# Altium PCB Teensywpinsfinal.PcbDoc
Units mil, origin at the board's own origin, x right, y up, seen from the top; angles counter-clockwise.
Board outline 6000 x 4000 mil, 2 copper layers (Top Layer, Bottom Layer), stack 12.8 mil thick; 56 components, 67 nets, 409 pads, 0 vias.
Unrouted connection lines stored in the file: 3.
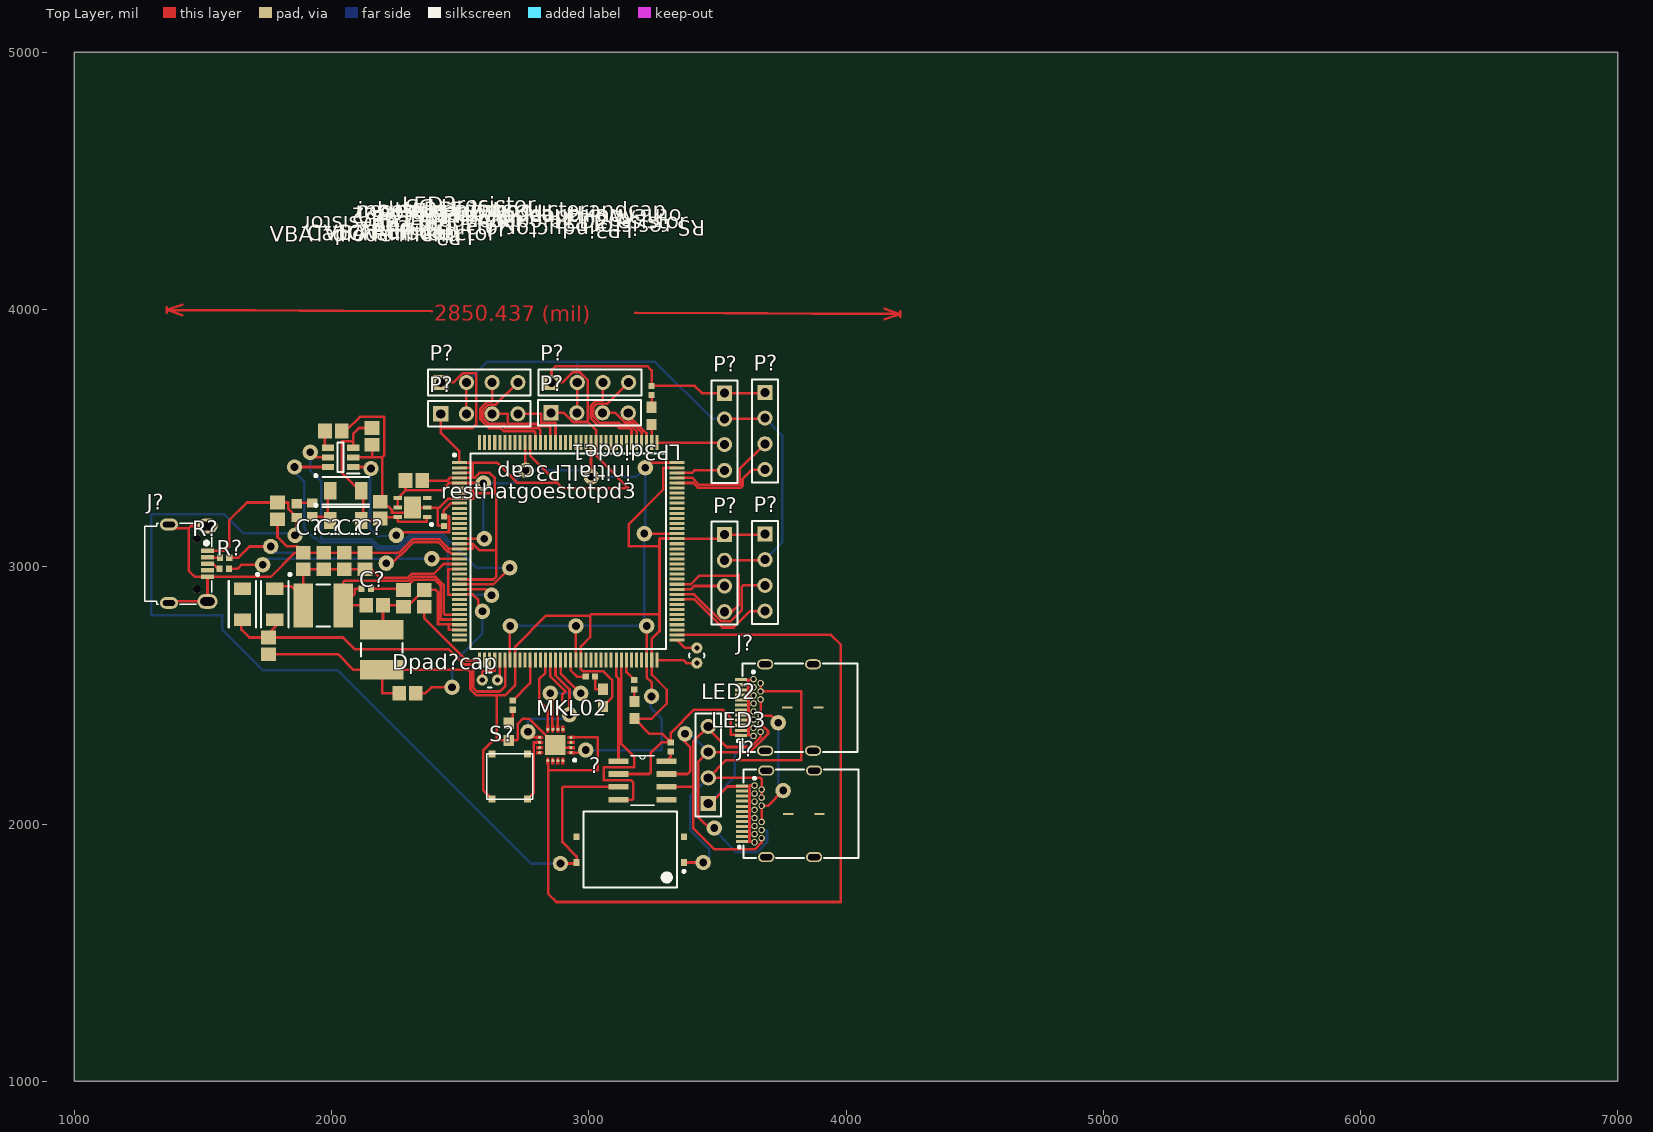
[diagram p0: Top Layer view]
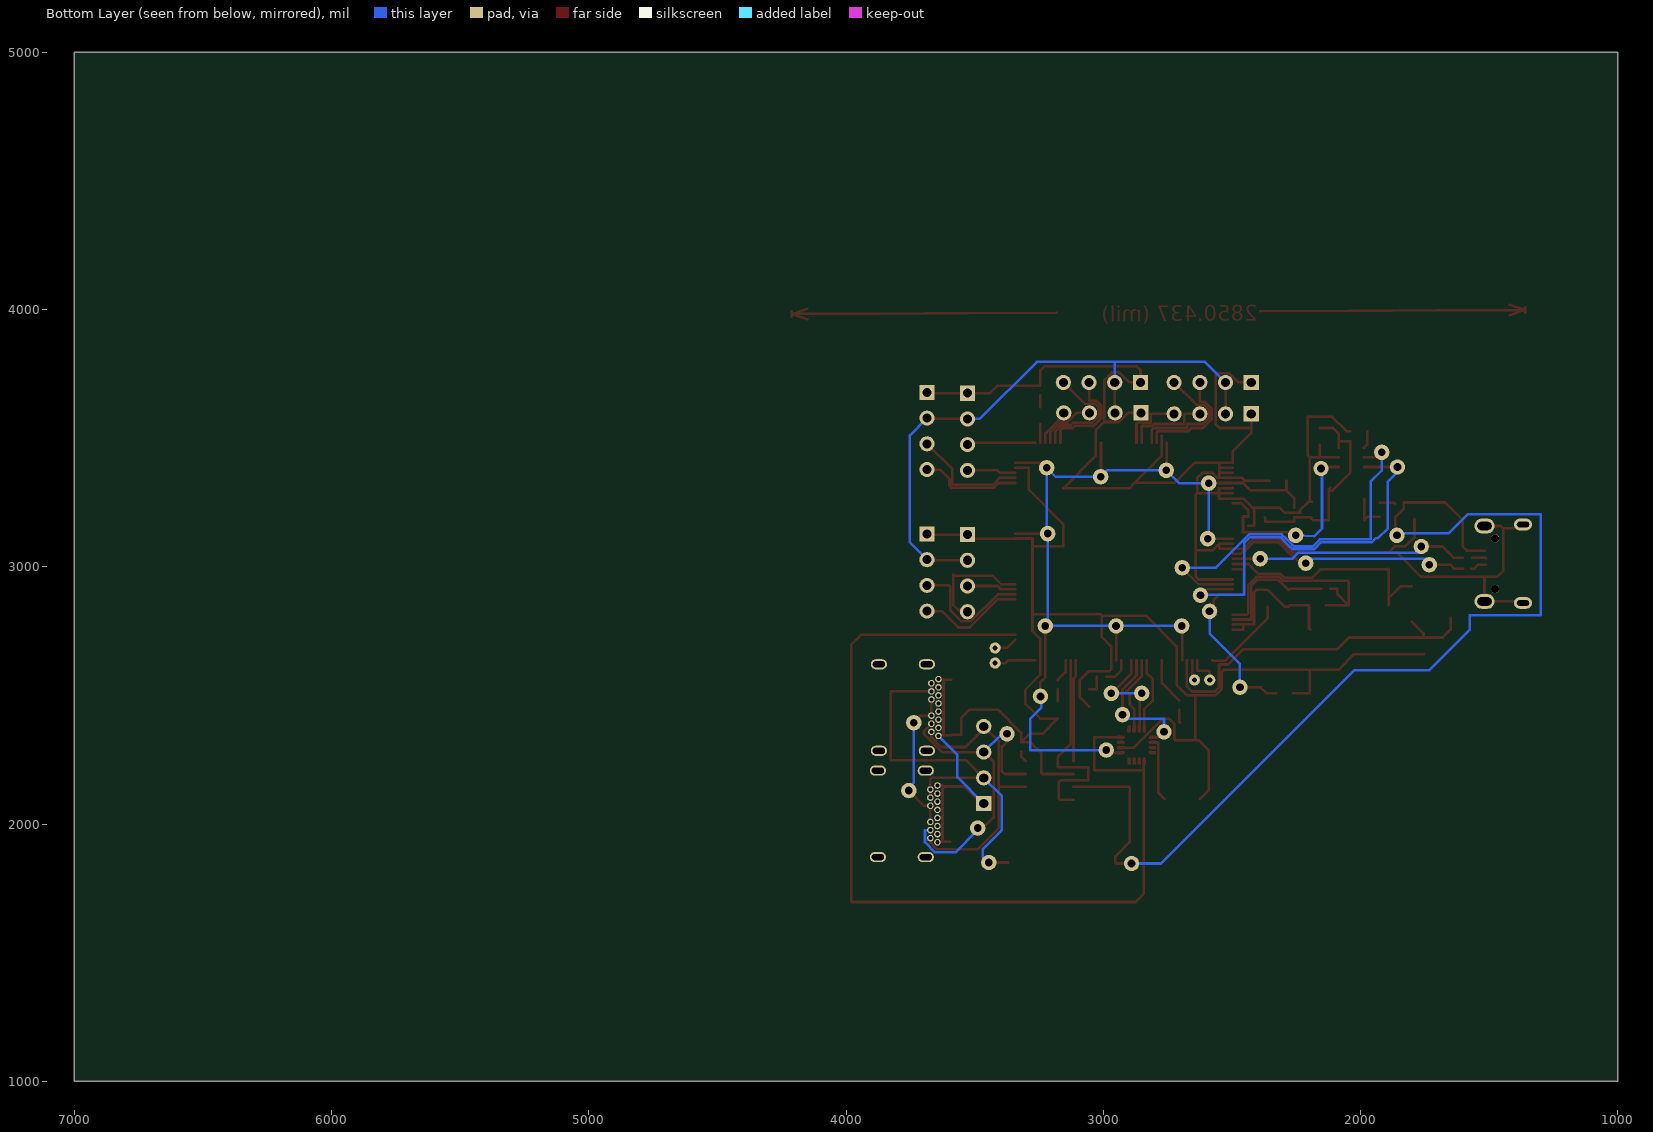
[diagram p1: Bottom Layer view, seen from below]

## Layer stack, top to bottom
Top Solder: solder mask 0.4, Solder Resist, Dk 3.5
Top Layer: signal copper 1.4
Dielectric 1: core 10, FR-4, Dk 4.2
Bottom Layer: signal copper 1.4
Bottom Solder: solder mask 0.4, Solder Resist, Dk 3.5

## Board outline
1000,1000 7000,1000 7000,5000 1000,5000

## Design rules (kind name [scope] priority, off if disabled: settings)
Clearance Clearance_1 [All] p1: gap=1 ignorepadtopadclearanceinfootprint=TRUE
Clearance [All] p2: gap=1 ignorepadtopadclearanceinfootprint=TRUE
ComponentClearance [All] p1: gap=1 collisioncheckmode=3 verticalgap=10 showdistances=FALSE
PolygonConnect [All] p1: connectstyle=Relief reliefconductorwidth=10 reliefentries=4 polygonreliefangle="90 Angle" airgapwidth=10
RoutingVias [All] p1: holewidth=28 width=50 viastyle="Through Hole" minholewidth=28 minwidth=50 maxholewidth=28 maxwidth=50
SolderMaskExpansion [All] p1: expansion=4
Width [All] p1: maxlimit=10 minlimit=10 preferedwidth=10
29 further rules are at their usual default settings.

## Classes and differential pairs
component class Teensywpinsfinal: "2nd inductor" ? "AREF cap" B? C? CapChainInductor D? dapthingy Dpad?cap F? inbetween1stinductorandcap initialLP3cap J? LED1 LED1resistor LED2 LED2resistor LED3 LED3resistor LP3 LP3diode1 LP3diode2 LP3diodecap LP3inductor MKL02 "next AREF cap" ondiode onlyTPD3cap otherweirdheader P? R? resthatgoestotpd3 "RS resistor" S? TPD3 TPD3capfromLP3 USBcap "VBAT diode" "VBAT diode cap" "VBAT diode friend" Y?

## Components (designator, comment, footprint, x,y, rotation, side; value= is the part's Value field where it differs from the comment)
"2nd inductor" "Inductor" INDC5041X06N 2195,2677.24 r90 top value=600
? "MCP2551-E/P" SOIC127P600X175-8N 3208.66,2169.29 r0 top
"AREF cap" "Cap" CAPC2012X06N 2280,2877.48 r270 top value=0.1uF
B? "MK66FX1M0VLQ18" QFP50P2200X2200X160-144N 2920,3060 r0 top
C? "Cap" CAPC2012X06N 2130,3022.52 r90 top value=0.1uF
C? "Cap" CAPC2012X06N 2050,3022.52 r90 top value=10nF
C? "Cap" CAPC2012X06N 1970,3022.52 r90 top value=10nF
C? "Cap" CAPC2012X06N 1890,3022.52 r90 top value=2.2uF
C? "Cap" CAPC2012X06N 2167.52,2850 r0 top value=2.2uF
CapChainInductor "Inductor" INDC5041X06N 1967.76,2850 r0 top value=600
dapthingy "Dip Switch" SOP254P1020X947-4N 2952.76,1950.39 r180 top
Dpad?cap "Cap" CAPC2012X06N 2295.28,2507.87 r180 top value=2.2uF
F? "500mA" CAPC1608X06N 1865,3218.43 r90 top
inbetween1stinductorandcap "Res1" CAPC1005X06N 2135,2915 r0 top value=470
initialLP3cap "Cap" CAPC2012X06N 2320,3335 r0 top value=2.2uF
J? "629105150521" 629105150521 1403.54,3011.81 r270 top
J? "632723100011" 632723100011 3813.19,2452.76 r90 top
J? "632723100011" 632723100011 3817.13,2039.37 r90 top
LED1 "LED0" 0603 2688.98,2358.27 r270 top
LED1resistor "Res1" CAPC1005X04N 2704.72,2462.2 r270 top value=1K
LED2 "LED0" 0603 3055.12,2490.16 r270 top
LED2resistor "Res1" CAPC1005X04N 3006.3,2573.23 r0 top value=1K
LED3 "LED0" 0603 3177.17,2442.91 r270 top
LED3resistor "Res1" CAPC1005X04N 3177.17,2541.73 r270 top value=1K
LP3 "LP38691SD-ADJ" SON95P300X300X80-7N 2315,3230 r180 top
LP3diode1 "Diode" SODFL370X105-2N 2055,3180 r0 top
LP3diode2 "Diode" SODFL370X105-2N 2055.12,3295.28 r0 top
LP3diodecap "Cap" CAPC2012X06N 2190,3220 r90 top value=0.1uF
LP3inductor "Inductor" CAPC1608X06N 1925,3221.57 r270 top value=120
MKL02 "MKL02Z32VFG4" QFN50P300X300X65-17N-D 2870.08,2307.09 r180 top
"next AREF cap" "Cap" CAPC2012X06N 2360,2877.52 r90 top value=0.1uF
ondiode "LED0" 0603 3244.09,3586.61 r90 top
onlyTPD3cap "Cap" CAPC2012X06N 2006.89,3527.56 r0 top value=100uF
otherweirdheader "Sensor8" HDR1X4 3464.57,2079.53 r90 top
P? "Sensor1" HDR1X4 2424.41,3594.49 r0 top
P? "Sensor3" HDR1X4 3685.04,3127.56 r270 top
P? "Sensor4" HDR1X4 2424.41,3716.54 r0 top
P? "Sensor6" HDR1X4 3685.04,3677.95 r270 top
P? "Sensor8" HDR1X4 2853.54,3598.43 r0 top
P? "Sensor7" HDR1X4 2855.12,3716.54 r0 top
P? "Sensor5" HDR1X4 3527.56,3125.2 r270 top
P? "Sensor2" HDR1X4 3527.56,3674.8 r270 top
R? "Res1" CAPC1005X06N 1582.68,2992.13 r0 top value=33
R? "Res1" CAPC1005X06N 1584.25,3035.43 r0 top value=33
R? "Res1" CAPC1005X06N 3244.09,3685.04 r90 top value=470
resthatgoestotpd3 "Res1" CAPC1005X06N 2437.01,3177.17 r90 top value=100K
"RS resistor" "Res1" CAPC1005X04N 3318.9,2299.21 r90 top value=10K
S? "TL3315NF100Q" TL3315NF100Q 2692.91,2185.04 r90 top
TPD3 "TPD3S014DBVR" SOT95P280X145-6N 2035.43,3425.2 r180 top
TPD3capfromLP3 "Cap" CAPC2012X06N 2157.48,3506.89 r270 top value=2.2uF
USBcap "Cap" CAPC2012X06N 1790,3217.48 r270 top value=2.2uF
"VBAT diode" "Diode" SODFL370X105-2N 1653.54,2854.33 r270 top
"VBAT diode cap" "Cap" CAPC2012X06N 1755,2692.48 r270 top value=0.1uF
"VBAT diode friend" "Diode" SODFL370X105-2N 1779.53,2854.33 r270 top
Y? "R145-32.768" R145 3420,2655 r180 top
Y? "R145-32.768" R145 2615.47,2560 r90 top

## Footprints (in the part's own frame and the unit in brackets; to place one, negate y for a bottom-side part, rotate by r counter-clockwise, add the part's x,y. Pads: shape width x height; smd on the part's side, far side on the other; paste and mask are expansions set on the pad)
0603 [mm]
  rect 1.1x1 smd: 1(-0.85,0) 2(0.85,0)
629105150521 [mm] "Micro USB 2.0 SMT Type B Horizontal 5 Contacts High Current"
  rect 0.45x1.3 smd: 1(-1.3,2.9) 2(-0.65,2.9) 3(0,2.9) 4(0.65,2.9) 5(1.3,2.9)
  oval 1.15x1.8 hole 0.55 slot 1.2 at 90 deg: Shell(-3.875,-0.9) Shell(3.875,-0.9)
  oval 1.45x2 hole 0.85 slot 1.4 at 90 deg: Shell(-3.725,2.9) Shell(3.725,2.9)
  round 0.8 hole 0.8 unplated: ""(-2.5,1.85) ""(2.5,1.85)
  silkscreen extent -4,-3.3 4,3.3, body extent -4,-3.3 4,3.3, height 2.71
632723100011 [mm] "USB 3.1 Type C Receptacle Horizontal THR"
  rect 0.3x1.2 smd: A1(-2.75,5.635) A2(-2.25,5.635) A3(-1.75,5.635) A4(-1.25,5.635) A5(-0.75,5.635) A6(-0.25,5.635) A7(0.25,5.635) A8(0.75,5.635) A9(1.25,5.635) A10(1.75,5.635) A11(2.25,5.635) A12(2.75,5.635)
  round 0.65 hole 0.4: B1(2.8,4.385) B2(2.4,3.685) B3(1.6,3.685) B4(1.2,4.385) B5(0.8,3.685) B6(0.4,4.385) B7(-0.4,4.385) B8(-0.8,3.685) B9(-1.2,4.385) B10(-1.6,3.685) B11(-2.4,3.685) B12(-2.8,4.385) Shell(-2,4.385) Shell(2,4.385)
  oval 1x1.6 hole 0.6 slot 1.2 at 90 deg: Shell(-4.27,-1.495) Shell(-4.27,3.235) Shell(4.27,-1.495) Shell(4.27,3.235)
  rect 0.2x1 smd: ""(0,1.055) ""(0,-2.045)
  silkscreen extent -4.37,-5.89 4.37,6.01, body extent -4.37,-5.89 4.37,5.9, height 3.05
CAPC1005X04N [mm] "Chip Capacitor, 2-Leads, Body 1.00x0.50mm, IPC Medium Density"
  rect 0.6x0.62 smd: 1(-0.46,0) 2(0.46,0)
  body extent -0.53,-0.28 0.53,0.27, height 0.37
CAPC1005X06N [mm] "Chip Capacitor, 2-Leads, Body 1.00x0.50mm, IPC Medium Density"
  rect 0.6x0.62 smd: 1(-0.46,0) 2(0.46,0)
  body extent -0.53,-0.28 0.53,0.27, height 0.6
CAPC1608X06N [mm] "Chip Capacitor, 2-Leads, Body 1.60x0.80mm, IPC Medium Density"
  rect 0.9x1 smd: 1(-0.675,0) 2(0.675,0)
  body extent -0.87,-0.48 0.87,0.47, height 0.6
CAPC2012X06N [mm] "Chip Capacitor, 2-Leads, Body 2.01x1.25mm, IPC Medium Density"
  rect 1.35x1.45 smd: 1(-0.825,0) 2(0.825,0)
  body extent -1.1,-0.72 1.11,0.72, height 0.6
HDR1X4 [mm] "Connector; Header; 4 Position"
  rect 1.5x1.5 hole 0.9: 1(0,0)
  round 1.5 hole 0.9: 2(2.54,0) 3(5.08,0) 4(7.62,0)
  silkscreen extent -1.27,-1.27 8.89,1.27
INDC5041X06N [mm] "Chip Inductor, 2-Leads, Body 5.00x4.06mm, IPC Medium Density"
  rect 1.91x4.33 smd: 1(-1.975,0) 2(1.975,0)
  silkscreen extent -0.65,-2.06 0.65,2.06, body extent -2.5,-2.15 2.5,2.15, height 0.6
QFN50P300X300X65-17N-D [mm]
  round 0.3 smd: 1(-1.55,0.75) 2(-1.55,0.25) 3(-1.55,-0.25) 4(-1.55,-0.75) 5(-0.75,-1.55) 6(-0.25,-1.55) 7(0.25,-1.55) 8(0.75,-1.55) 9(1.55,-0.75) 10(1.55,-0.25) 11(1.55,0.25) 12(1.55,0.75) 13(0.75,1.55) 14(0.25,1.55) 15(-0.25,1.55) 16(-0.75,1.55)
  rrect0% 2x2 smd: 17(0,0)
  Top Layer region: -1.9,0.9 -1.35,0.912 -1.235,0.865 -1.188,0.75 -1.235,0.635 -1.35,0.588 -1.35,0.6 -1.9,0.6 -1.9,0.9
  Top Layer region: -1.9,0.4 -1.35,0.412 -1.235,0.365 -1.188,0.25 -1.235,0.135 -1.35,0.088 -1.35,0.1 -1.9,0.1 -1.9,0.4
  Top Layer region: -1.9,-0.1 -1.35,-0.088 -1.235,-0.135 -1.188,-0.25 -1.235,-0.365 -1.35,-0.412 -1.35,-0.4 -1.9,-0.4 -1.9,-0.1
  Top Layer region: -1.9,-0.6 -1.35,-0.588 -1.235,-0.635 -1.188,-0.75 -1.235,-0.865 -1.35,-0.912 -1.35,-0.9 -1.9,-0.9 -1.9,-0.6
  Top Layer region: -0.9,-1.9 -0.912,-1.35 -0.865,-1.235 -0.75,-1.188 -0.635,-1.235 -0.588,-1.35 -0.6,-1.35 -0.6,-1.9 -0.9,-1.9
  Top Layer region: -0.4,-1.9 -0.412,-1.35 -0.365,-1.235 -0.25,-1.188 -0.135,-1.235 -0.088,-1.35 -0.1,-1.35 -0.1,-1.9 -0.4,-1.9
  Top Layer region: 0.1,-1.9 0.088,-1.35 0.135,-1.235 0.25,-1.188 0.365,-1.235 0.412,-1.35 0.4,-1.35 0.4,-1.9 0.1,-1.9
  Top Layer region: 0.6,-1.9 0.588,-1.35 0.635,-1.235 0.75,-1.188 0.865,-1.235 0.912,-1.35 0.9,-1.35 0.9,-1.9 0.6,-1.9
  Top Layer region: 1.9,-0.9 1.35,-0.912 1.235,-0.865 1.188,-0.75 1.235,-0.635 1.35,-0.588 1.35,-0.6 1.9,-0.6 1.9,-0.9
  Top Layer region: 1.9,-0.4 1.35,-0.412 1.235,-0.365 1.188,-0.25 1.235,-0.135 1.35,-0.088 1.35,-0.1 1.9,-0.1 1.9,-0.4
  Top Layer region: 1.9,0.1 1.35,0.088 1.235,0.135 1.188,0.25 1.235,0.365 1.35,0.412 1.35,0.4 1.9,0.4 1.9,0.1
  Top Layer region: 1.9,0.6 1.35,0.588 1.235,0.635 1.188,0.75 1.235,0.865 1.35,0.912 1.35,0.9 1.9,0.9 1.9,0.6
  Top Layer region: 0.9,1.9 0.912,1.35 0.865,1.235 0.75,1.188 0.635,1.235 0.588,1.35 0.6,1.35 0.6,1.9 0.9,1.9
  Top Layer region: 0.4,1.9 0.412,1.35 0.365,1.235 0.25,1.188 0.135,1.235 0.088,1.35 0.1,1.35 0.1,1.9 0.4,1.9
  Top Layer region: -0.1,1.9 -0.088,1.35 -0.135,1.235 -0.25,1.188 -0.365,1.235 -0.412,1.35 -0.4,1.35 -0.4,1.9 -0.1,1.9
  Top Layer region: -0.6,1.9 -0.588,1.35 -0.635,1.235 -0.75,1.188 -0.865,1.235 -0.912,1.35 -0.9,1.35 -0.9,1.9 -0.6,1.9
  silkscreen extent -2.02,1.38 -1.78,1.62
QFP50P2200X2200X160-144N [mm]
  rect 1.475x0.3 smd: 1(-10.738,8.75) 2(-10.738,8.25) 3(-10.738,7.75) 4(-10.738,7.25) 5(-10.738,6.75) 6(-10.738,6.25) 7(-10.738,5.75) 8(-10.738,5.25) 9(-10.738,4.75) 10(-10.738,4.25) 11(-10.738,3.75) 12(-10.738,3.25) 13(-10.738,2.75) 14(-10.738,2.25) 15(-10.738,1.75) 16(-10.738,1.25) 17(-10.738,0.75) 18(-10.738,0.25) 19(-10.738,-0.25) 20(-10.738,-0.75) 21(-10.738,-1.25) 22(-10.738,-1.75) 23(-10.738,-2.25) 24(-10.738,-2.75) 25(-10.738,-3.25) 26(-10.738,-3.75) 27(-10.738,-4.25) 28(-10.738,-4.75) 29(-10.738,-5.25) 30(-10.738,-5.75) 31(-10.738,-6.25) 32(-10.738,-6.75) 33(-10.738,-7.25) 34(-10.738,-7.75) 35(-10.738,-8.25) 36(-10.738,-8.75) 73(10.738,-8.75) 74(10.738,-8.25) 75(10.738,-7.75) 76(10.738,-7.25) 77(10.738,-6.75) 78(10.738,-6.25) 79(10.738,-5.75) 80(10.738,-5.25) 81(10.738,-4.75) 82(10.738,-4.25) 83(10.738,-3.75) 84(10.738,-3.25) 85(10.738,-2.75) 86(10.738,-2.25) 87(10.738,-1.75) 88(10.738,-1.25) 89(10.738,-0.75) 90(10.738,-0.25) 91(10.738,0.25) 92(10.738,0.75) 93(10.738,1.25) 94(10.738,1.75) 95(10.738,2.25) 96(10.738,2.75) 97(10.738,3.25) 98(10.738,3.75) 99(10.738,4.25) 100(10.738,4.75) 101(10.738,5.25) 102(10.738,5.75) 103(10.738,6.25) 104(10.738,6.75) 105(10.738,7.25) 106(10.738,7.75) 107(10.738,8.25) 108(10.738,8.75)
  rect 0.3x1.475 smd: 37(-8.75,-10.738) 38(-8.25,-10.738) 39(-7.75,-10.738) 40(-7.25,-10.738) 41(-6.75,-10.738) 42(-6.25,-10.738) 43(-5.75,-10.738) 44(-5.25,-10.738) 45(-4.75,-10.738) 46(-4.25,-10.738) 47(-3.75,-10.738) 48(-3.25,-10.738) 49(-2.75,-10.738) 50(-2.25,-10.738) 51(-1.75,-10.738) 52(-1.25,-10.738) 53(-0.75,-10.738) 54(-0.25,-10.738) 55(0.25,-10.738) 56(0.75,-10.738) 57(1.25,-10.738) 58(1.75,-10.738) 59(2.25,-10.738) 60(2.75,-10.738) 61(3.25,-10.738) 62(3.75,-10.738) 63(4.25,-10.738) 64(4.75,-10.738) 65(5.25,-10.738) 66(5.75,-10.738) 67(6.25,-10.738) 68(6.75,-10.738) 69(7.25,-10.738) 70(7.75,-10.738) 71(8.25,-10.738) 72(8.75,-10.738) 109(8.75,10.738) 110(8.25,10.738) 111(7.75,10.738) 112(7.25,10.738) 113(6.75,10.738) 114(6.25,10.738) 115(5.75,10.738) 116(5.25,10.738) 117(4.75,10.738) 118(4.25,10.738) 119(3.75,10.738) 120(3.25,10.738) 121(2.75,10.738) 122(2.25,10.738) 123(1.75,10.738) 124(1.25,10.738) 125(0.75,10.738) 126(0.25,10.738) 127(-0.25,10.738) 128(-0.75,10.738) 129(-1.25,10.738) 130(-1.75,10.738) 131(-2.25,10.738) 132(-2.75,10.738) 133(-3.25,10.738) 134(-3.75,10.738) 135(-4.25,10.738) 136(-4.75,10.738) 137(-5.25,10.738) 138(-5.75,10.738) 139(-6.25,10.738) 140(-6.75,10.738) 141(-7.25,10.738) 142(-7.75,10.738) 143(-8.25,10.738) 144(-8.75,10.738)
  silkscreen extent -11.35,-9.65 9.65,9.65
R145 [mm] "Crystal, Thru-Hole; 2 Leads; Body 1.5 x 5.1 mm (Dia.xH)"
  round 1.1 hole 0.5: 1(0,0.75) 2(0,-0.75)
  silkscreen extent -0.75,-0.18 0.75,0.18
SODFL370X105-2N [mm] "SODFL, 2-Leads, Body 2.50x3.70mm, IPC Medium Density"
  rect 1.25x1.7 smd: 1(-1.525,0) 2(1.525,0)
  silkscreen extent -3.07,-1.35 2.3,1.62, body extent -2.3,-1.35 2.3,1.35, height 1.05
SOIC127P600X175-8N [mil]
  rect 78x22 smd: 1(-93,75) 2(-93,25) 3(-93,-25) 4(-93,-75) 5(93,-75) 6(93,-25) 7(93,25) 8(93,75)
  silkscreen extent -46,-96 46,96
SON95P300X300X80-7N [mm]
  rect 0.85x0.4 smd: 1(-1.45,0.95) 2(-1.45,0) 3(-1.45,-0.95) 4(1.45,-0.95) 5(1.45,0) 6(1.45,0.95)
  rect 1.7x2.2 smd: 7(0,0)
  silkscreen extent -2,1.53 -1.75,1.77
SOP254P1020X947-4N [mm] "SOP, 4-Leads, Body 7.26x9.78mm, Pitch 2.54mm, IPC Medium Density"
  rect 0.6x0.65 smd: 1(-10.6,2.54) 2(-10.6,0) 3(0,0) 4(0,2.54)
  silkscreen extent -10.73,-2.48 -0.7,5.02, body extent -10.3,-2.48 -0.3,5.02, height 9.47
SOT95P280X145-6N [mm]
  rect 1.2x0.6 smd: 1(-1.25,0.95) 2(-1.25,0) 3(-1.25,-0.95) 4(1.25,-0.95) 5(1.25,0) 6(1.25,0.95)
  silkscreen extent -1.85,-1.45 0.3,1.6
TL3315NF100Q [mm]
  rect 0.7x0.7 smd: 1(-2.225,1.75) 2(2.225,1.75) 3(-2.225,-1.75) 4(2.225,-1.75)
  silkscreen extent -2.25,-2.25 2.25,2.25

## Part data
?: "IC TRANSCEIVER CAN HI-SPD 8-DIP", Package="DIP-8 Microchip", Availability=Good, MF=Microchip, MP=MCP2551-E/P, Price="1.03 USD"
"AREF cap" C? C? C? C? C? Dpad?cap initialLP3cap LP3diodecap "next AREF cap" onlyTPD3cap TPD3capfromLP3 USBcap "VBAT diode cap": "Capacitor", LatestRevisionDate=17-Jul-2002, LatestRevisionNote="Re-released for DXP Platform.", PackageDescription="Radial Cap, Thru-Hole; 2 Leads; 0.3 in Pin Spacing", PackageReference=RAD-0.3, Published=8-Jun-2000, Publisher="Altium Limited"
B?: "NXP - MK66FX1M0VLQ18 - MPU, ARM CORTEX-M4F, 180MHZ, LQFP-144", Manufacturer_Name=Nexperia, Datasheet Link=https://cache.nxp.com/docs/en/data-sheet/K66P144M180SF5V2.pdf, Geometry.Height=1.6mm, Manufacturer_Part_Number=MK66FX1M0VLQ18, Supplier_Name=RS
dapthingy otherweirdheader P? P? P? P? P? P? P? P?: library part "Header 4", "Header, 4-Pin", LatestRevisionDate=17-Jul-2002, LatestRevisionNote="Re-released for DXP Platform.", Publisher="Altium Limited"
F?: library part "Fuse 1", "Fuse", LatestRevisionDate=17-Jul-2002, LatestRevisionNote="Re-released for DXP Platform.", PackageDescription="Thru-Hole; 2 Leads", PackageReference=PIN-W2/E2.8, Published=8-Jun-2000, Publisher="Altium Limited"
inbetween1stinductorandcap LED1resistor LED2resistor LED3resistor R? R? R? resthatgoestotpd3 "RS resistor": "Resistor", LatestRevisionDate=17-Jul-2002, LatestRevisionNote="Re-released for DXP Platform.", PackageDescription="Axial Device, Thru-Hole; 2 Leads; 0.3 in Pin Spacing", PackageReference=AXIAL-0.3, Published=8-Jun-2000, Publisher="Altium Limited"
J?: "Micro USB 2.0 SMT Type B Horizontal 5 Contacts High Current WR-COM", ComponentLink1Description=Manufacturer, ComponentLink1URL=http://www.we-online.de, ComponentLink2Description=Datasheet, ComponentLink2URL=http://katalog.we-online.de/em/datasheet/629105150521.pdf, Construction=SMT, Gender=Receptacle, Interface Type="Type B", Part Number=629105150521, Published Date="April 2017", Publisher="Wurth Elektronik", Sub-Family="Micro USB 2.0", Type=Horizontal
J? J?: "USB 3.1 Type C Receptacle Horizontal THR WR-COM", ComponentLink1Description=Manufacturer, ComponentLink1URL=http://www.we-online.de, ComponentLink2Description=Datasheet, ComponentLink2URL=http://katalog.we-online.de/em/datasheet/632723x00011.pdf, Construction=THR, Gender=Receptacle, Interface Type="Type C", Part Number=632723100011, Published Date="April 2017", Publisher="Wurth Elektronik", Sub-Family="USB 3.1", Type=Horizontal
LED1 LED2 LED3 ondiode: "Typical INFRARED GaAs LED", LatestRevisionDate=08-Jul-2005, LatestRevisionNote="Mech Layer 1 removed.", PackageDescription="LED; 2 Leads", PackageReference=LED-0, Published=8-Jun-2000, Publisher="Altium Limited"
LP3: "500mA LDO Regulator Adj.,LP38691SD-ADJ", Manufacturer_Name="Texas Instruments", Mouser Part Number=926-LP38691SD-ADJ, Datasheet Link=http://www.ti.com/lit/ds/symlink/lp38691-adj.pdf, Geometry.Height=0.8mm, Manufacturer_Part_Number=LP38691SD-ADJ, Supplier_Name=Mouser
LP3diode1 LP3diode2 "VBAT diode" "VBAT diode friend": "Default Diode", Code_JEDEC=DO-214-AB, LatestRevisionDate=17-Jul-2002, LatestRevisionNote="Re-released for DXP Platform.", PackageDescription="DO-214-AB/SMC; 2 C-Bend Leads; Body 7.9 x 5.9 mm, inc. leads (LxW)", PackageReference=SMC, PackageVersion=Sep-1996, Published=8-Jun-2000, Publisher="Altium Limited"
MKL02: "Freescale MKL02Z32VFG4, 32bit ARM Cortex M0 Microcontroller, 48MHz, 32 kB Flash, 16-Pin QFN", Manufacturer_Name=Nexperia, RS Part Number=7884723, Datasheet Link=http://cache.nxp.com/files/32bit/doc/data_sheet/KL02P32M48SF0.pdf, Geometry.Height=0.65mm, Manufacturer_Part_Number=MKL02Z32VFG4, Supplier_Name=RS
S?: "SWITCH TACTILE SPST-NO 0.05A 15V", Package=None, Availability=Good, MF=E-Switch, MP=TL3315NF100Q, Price="0.13 USD"
TPD3: "Current Limit Load Sw & TVS 0.5A SOT23-6 Texas Instruments TPD3S014DBVR Load Switch IC, Current Limit Switch, 4.5  5.5V, 6-Pin, SOT-23", Manufacturer_Name="Texas Instruments", RS Part Number=9009703P, Datasheet Link=http://www.ti.com/lit/ds/symlink/tpd3s044.pdf, Geometry.Height=1.45mm, Manufacturer_Part_Number=TPD3S014DBVR, Supplier_Name=RS
Y? Y?: "Tuning Fork Crystal Unit", ComponentLink1Description="Manufacturer Link", ComponentLink1URL=http://www.raltron.com/products/microcrystals/default.asp, ComponentLink2Description=Datasheet, ComponentLink2URL=http://www.raltron.com/products/pdfspecs/crystal_r38_26_145.pdf, DatasheetDocument=28-Sep-1998, LatestRevisionDate=17-Jul-2002, LatestRevisionNote="Re-released for DXP Platform.", PackageReference=R145, Published=8-Jun-2000, Publisher="Altium Limited"
"2nd inductor" CapChainInductor LP3inductor: Code_IEC=1005, Code_JEITA=0402, LatestRevisionDate=29-May-2009, LatestRevisionNote="IPC-7351 Footprint Added.", PackageDescription="Chip Inductor", PackageReference=0402-A, Published=8-Jun-2000, Publisher="Altium Limited"

## Free pads (board coordinates)
  round 60 hole 30: 2(2590,3325) 3(2755,3375) 4(3010,3350) 5(3220,3385) 6(3216.1,3128.9) 7(3225,2770) 8(2950,2770) 9(2695,2770) 10(2594.21,3109.21) 11(2251.97,3122.05) 12(2153.54,3381.89) 13(1917.32,3444.88) 14(2692.91,2996.06) 15(1856.3,3387.8) 16(2622.05,2889.76) 19(2586.61,2826.77) 20(2468.5,2531.5) 21(2763.78,2358.27) 22(2925.2,2425.2) 24(2850.39,2507.87) 25(2968.5,2507.87) 27(2988.19,2287.4) 29(3244.09,2496.06) 30(2212.6,3014) 31(2389.76,3031.5) 32(1732.28,3007.87) 33(1763.78,3078.74) 34(3736.22,2393.7) 35(3755.91,2129.92) 38(3488.19,1984.25) 39(3374.02,2350.39) 40(1858.27,3122.05) 41(2889.76,1846.46) 42(3444.88,1850.39)

## Nets (pads, with @x,y where several pads share a name; then routed paths per layer and width w, separated by ;. In a path a pad name is that pad's centre, name@x,y a point inside that pad or via, vN(x,y) a via of type N, cw(c..) or ccw(c..) an arc to the next point about the centre after c; other vN are vias at no path point)
"3.3v1 Header": "VBAT diode friend.1" B?.5 B?.16 B?.21 B?.43 B?.56 B?.70 B?.94 B?.108 B?.122 B?.135 C?.1@1890,2990.04 C?.1@1970,2990.04 C?.1@2050,2990.04 C?.1@2130,2990.04 CapChainInductor.1 initialLP3cap.1 LP3.4 LP3.5 MKL02.1 pad.2 pad.3 pad.4 pad.5 pad.6 pad.7 pad.8 pad.9 pad.10 pad.27 pad.29 | length 4900
  Top Layer w10: 1800,2923.9 1843.9,2923.9 CapChainInductor.1@1890,2877.8 ; CapChainInductor.1 CapChainInductor.1@1890,2877.8 ; C?.1@1890,2992.56 C?.1@1892.52,2990.04 ; LP3.5 LP3.4 2287.52,3297.01 ; initialLP3cap.1 2287.52,3297.01 ; B?.21 2435.79,3010.79 2397.44,2972.44 2311.02,2972.44 2295.28,2956.69 2188.98,2956.69 2155.63,2990.04 2130,2990.04 2050,2990.04 1970,2990.04 C?.1@1892.52,2990.04 ; B?.16 pad.10 ; pad.2@2569.25,3325.75 B?.5 2456.3,3325.75 2427.56,3297.01 2287.52,3297.01 ; B?.43 pad.9@2693.62,2748.62 ; pad.3@2752.68,3392.32 B?.135 ; MKL02.1 pad.27@2974.41,2277.56 ; B?.56 pad.8@2949.53,2749.53 ; pad.4@3008.58,3376.42 B?.122 ; pad.6 B?.94 ; pad.7@3225.12,2749.88 B?.70 3225.12,2570.16 3244.09,2551.18 pad.29 ; pad.5@3240.51,3404.49 B?.108 ; CapChainInductor.1@1890,2877.8 1890,2990.04 C?.1@1892.52,2990.04
  Bottom Layer w10: pad.10 2590,3113.43 pad.2 2705,3325 pad.3 2985,3375 pad.4 3185,3350 pad.5 3220,3132.8 pad.6 3216.1,2778.9 pad.7 pad.8 pad.9 ; pad.27 3283.46,2287.4 3283.46,2409.45 3240.16,2452.76 pad.29@3240.16,2472.44
12V: J?.B5 J?.B8 pad.34 pad.35 | length 557.2
  Top Layer w10: J?.B5@3668.11,2484.25 3668.11,2421.26 3708.66,2421.26 pad.34@3720.47,2409.45 ; J?.B8@3672.05,2007.87 3672.05,2070.87 3696.85,2070.87 pad.35
  Bottom Layer w10: pad.34 3736.22,2161.42 pad.35@3759.84,2137.8
A1: B?.129 P?.4@2724.41,3594.49 | length 257.7
  Top Layer w10: P?.4@2724.41,3594.49 2814.96,3594.49 2814.96,3559.06 2870.08,3559.06 2870.79,3558.35 B?.129
A2: B?.106 P?.4@3527.56,3374.8 | length 188.8
  Top Layer w10: B?.106 3400.55,3365.12 3410.24,3374.8 P?.4@3527.56,3374.8
A3: B?.81 P?.4@3685.04,2827.56 | length 415.4
  Top Layer w10: B?.81@3343.78,2874.02 B?.81 3410.47,2872.99 3519.68,2763.78 3562.99,2763.78 3626.77,2827.56 P?.4@3685.04,2827.56
A4: B?.84 P?.4@3527.56,2825.2 | length 438.7
  Top Layer w10: B?.84 3396.61,2932.05 3429.13,2964.57 3578.74,2964.57 3582.68,2968.5 3582.68,2850.39 3557.48,2825.2 P?.4@3527.56,2825.2
A5: B?.132 P?.4@2724.41,3716.54 | length 510.8
  Top Layer w10: P?.4@2724.41,3716.54 2637.89,3630.02 2609.69,3630.02 2588.88,3609.2 2588.88,3578.1 2611.87,3555.12 2673.23,3555.12 2673.23,3539.37 2803.15,3539.37 2811.73,3530.79 B?.132
A6: B?.104 P?.4@3685.04,3377.95 | length 394.2
  Top Layer w10: B?.104 3406.73,3325.75 3424.58,3307.9 3591.17,3307.9 3597.61,3314.34 3597.61,3340.77 3634.8,3377.95 P?.4@3685.04,3377.95
A7: B?.113 P?.4@3155.12,3716.54 | length 449
  Top Layer w10: P?.4@3155.12,3716.54 3072.54,3633.95 3031.59,3633.95 3018.02,3620.38 3018.02,3583.71 3042.67,3559.06 3118.11,3559.06 3125.98,3551.18 3161.42,3551.18 3185.75,3526.85 B?.113
A8: B?.111 P?.4@3153.54,3598.43 | length 145.3
  Top Layer w10: P?.4@3153.54,3598.43 3153.54,3590.36 3225.12,3518.79 B?.111
"A10 Header": B?.30
"A11 Header": B?.29
"AGND Header": "2nd inductor.2" "AREF cap.2" "next AREF cap.2" B?.33 B?.34 C?.2@2200,2850 | length 616
  Top Layer w10: 2195,2755 2200,2760 2200,2850 2275,2850 2280,2845 2295,2845 2360,2910 2405,2910 2414,2901 2414,2776 2454.91,2776 ; B?.34 2455.12,2754.88 2455,2755 2455,2775.91 2454.91,2776 ; B?.33 2495.81,2776 2454.91,2776
"AREF Header": "AREF cap.1" B?.32 inbetween1stinductorandcap.2 | length 503.5
  Top Layer w10: inbetween1stinductorandcap.2 2274.96,2915 2280,2909.96 2320.04,2950 2400,2950 2425,2925 2425,2795 2496.5,2795 B?.32
B1: B?.130 P?.3@2624.41,3594.49 | length 358.5
  Top Layer w10: P?.3@2624.41,3594.49 2685.04,3594.49 2685.04,3555.12 2803.15,3555.12 2811.02,3547.24 2850.39,3547.24 2850.39,3483.46 B?.130 B?.130@2851.1,3507.87
B2: B?.109 P?.3@3527.56,3474.8 | length 266.4
  Top Layer w10: B?.109 3519.61,3482.76 P?.3@3527.56,3474.8
B3: B?.82 P?.3@3685.04,2927.56 | length 497
  Top Layer w10: B?.82 3409.84,2892.68 3515.11,2787.4 3551.18,2787.4 3594.49,2830.71 3594.49,2921.26 3600.79,2927.56 P?.3@3685.04,2927.56
B4: B?.83 P?.3@3527.56,2925.2 | length 190.1
  Top Layer w10: B?.83 3396.61,2912.36 3409.45,2925.2 P?.3@3527.56,2925.2
B5: B?.133 P?.3@2624.41,3716.54 | length 447
  Top Layer w10: P?.3@2624.41,3716.54 2624.41,3644.09 2621.33,3641.02 2605.14,3641.02 2577.88,3613.76 2577.88,3573.55 2612.06,3539.37 2657.48,3539.37 2669.29,3527.56 2787.4,3527.56 2792.05,3522.91 B?.133
B6: B?.105 P?.3@3685.04,3477.95 | length 454.7
  Top Layer w10: B?.105 3402.6,3345.43 3429.13,3318.9 3586.61,3318.9 3586.61,3379.53 P?.3@3685.04,3477.95
B7: B?.114 P?.3@3055.12,3716.54 | length 400.5
  Top Layer w10: P?.3@3055.12,3716.54 3055.12,3645.67 3054.4,3644.95 3027.03,3644.95 3007.02,3624.93 3007.02,3579.15 3038.11,3548.06 3110.24,3548.06 3118.92,3539.37 3157.48,3539.37 3166.06,3530.79 B?.114
B8: B?.112 P?.3@3053.54,3598.43 | length 223.3
  Top Layer w10: P?.3@3053.54,3598.43 3103.3,3598.43 3138.83,3562.9 3165.45,3562.9 3205.43,3522.91 B?.112
CAN_Rx: ?.4 B?.65 | length 846.7
  Top Layer w10: ?.4 3169.09,2094.29 3173.23,2098.43 3173.23,2161.42 3165.35,2169.29 3059.06,2169.29 3059.06,2220.47 3177.17,2220.47 3177.17,2259.84 3126.69,2310.32 B?.65
CAN_Tx: ?.1 B?.64 | length 396.5
  Top Layer w10: B?.64 3107.01,2574.09 3115.66,2565.44 ?.1
CANH: ?.7 J?.B10 otherweirdheader.3 pad.38 pad.39 | length 1336.9
  Top Layer w10: ?.7 3383.27,2194.29 3393.7,2204.72 3393.7,2299.21 pad.39@3370.08,2322.83 ; pad.38@3488.19,1976.38 3476.38,1976.38 3429.13,2023.62 3425.2,2023.62 3425.2,2240.16 otherweirdheader.3 3625.98,2279.53 3696.85,2350.39 3696.85,2361.02 J?.B10@3668.11,2389.76
  Bottom Layer w10: pad.39 3393.7,2350.39 otherweirdheader.3 ; pad.38@3488.19,1976.38 3574.8,1889.76 3653.54,1889.76 3692.91,1929.13 3692.91,1976.38 J?.B10@3672.05,1976.38
CANL: ?.6 J?.B11 otherweirdheader.4 | length 1131.8
  Top Layer w10: ?.6 3404.13,2144.29 3405.51,2145.67 ; J?.B11@3668.11,2358.27 3668.11,2337.4 3629.92,2299.21 3535.43,2299.21 3464.57,2370.08 otherweirdheader.4 3405.51,2320.47 3405.51,2145.67 ; J?.B11@3672.05,1944.88 3672.05,1927.95 3645.67,1901.57 3488.19,1901.57 3405.51,1984.25 3405.51,2145.67
"D Pad?": B?.22 B?.27 Dpad?cap.1 pad.19 pad.20 | length 815.6
  Top Layer w10: Dpad?cap.1 2364.17,2507.87 2387.8,2531.5 pad.20 ; B?.22 2453.78,2991.1 2453.78,2890.79 2495.35,2890.79 B?.27 2548.27,2892.68 2570.87,2870.08 2570.87,2842.52 pad.19
  Bottom Layer w10: pad.20 2468.5,2622.05 2586.61,2740.16 pad.19
"D+ Header": B?.26 pad.15 pad.16 TPD3.6 | length 1491.8
  Top Layer w10: pad.15 TPD3.6 ; B?.26 2599.45,2912.36 pad.16
  Bottom Layer w10: pad.15 1856.3,3368.11 1893.7,3330.71 1893.7,3149.61 1933.07,3110.24 1941.14,3110.24 1956.07,3095.3 2152.92,3095.3 2180.48,3067.74 2263.41,3067.74 2270.72,3075.05 2271.44,3075.05 2298.97,3102.58 2298.97,3103.29 2310.66,3114.98 2428.51,3114.98 2451.94,3091.55 2451.94,2890.57 pad.16@2603.17,2890.57
"D- Header": B?.25 pad.13 pad.14 TPD3.5 | length 1453.3
  Top Layer w10: pad.13@1929.13,3425.2 TPD3.5 ; B?.25 2628.9,2932.05 pad.14
  Bottom Layer w10: pad.13 1917.32,3374.02 1960.63,3330.71 1960.63,3106.3 2157.48,3106.3 2185.04,3078.74 2258.86,3078.74 2266.17,3086.05 2266.88,3086.05 2287.97,3107.14 2287.97,3107.85 2306.1,3125.98 2433.07,3125.98 2562.99,2996.06 pad.14
"DC Header": B?.50 MKL02.8 | length 293.1
  Top Layer w10: B?.50 2831.42,2587.32 2807.09,2562.99 2807.09,2480.32 2840.55,2446.85 MKL02.8
"DD header": B?.53 MKL02.7 pad.24 pad.25 | length 401.8
  Top Layer w10: 2858.27,2374.02 pad.24@2858.27,2496.06 ; B?.53 2890.47,2585.91 pad.25
  Bottom Layer w10: pad.24 pad.25
"DE Header": MKL02.3
"G1 Header": "2nd inductor.1" "RS resistor.2" "VBAT diode cap.2" ?.2 B?.1 B?.2 B?.3 B?.4 B?.6 B?.7 B?.8 B?.17 B?.18 B?.24 B?.44 B?.57 B?.71 B?.93 B?.107 B?.121 B?.134 C?.2@1890,3055 C?.2@1970,3055 C?.2@2050,3055 C?.2@2130,3055 Dpad?cap.2 initialLP3cap.2 J?.5 J?.A1 J?.A12 J?.B1 J?.B12 J?.Shell@1368.11,2859.25 J?.Shell@1368.11,3164.37 J?.Shell@1517.72,2865.16 J?.Shell@1517.72,3158.46 LED1.2 LED2.2 LED3.2 LP3.2 LP3.7 LP3diodecap.2 MKL02.2 MKL02.17 onlyTPD3cap.2 otherweirdheader.1 P?.1 R?.2@3244.09,3703.15 resthatgoestotpd3.1 S?.1 TPD3.2 TPD3capfromLP3.2 USBcap.2 | length 15116.7
  Top Layer w10: J?.Shell@1368.11,2859.25 1374.02,2865.16 1517.72,2865.16 J?.5 ; J?.Shell@1368.11,3164.37 1382.87,3149.61 1444.88,3149.61 ; J?.Shell@1517.72,3158.46 1453.74,3158.46 1444.88,3149.61 ; 1755,2660 2025,2660 2085.51,2599.49 2195,2599.49 ; USBcap.2 1790,3115.51 1825.51,3080 1865,3080 C?.2@1890,3055 ; onlyTPD3cap.2 2055.12,3527.56 2110.24,3582.68 2204.72,3582.68 2204.72,3433.07 2196.85,3425.2 ; TPD3.2 2157.48,3425.2 ; TPD3capfromLP3.2 2157.48,3425.2 ; Dpad?cap.2 2196.85,2507.87 2196.85,2597.64 2195,2599.49 ; initialLP3cap.2 2450,3335 2460.43,3345.43 B?.4 2549.57,3345.43 ; P?.1@2424.41,3594.49 2425.2,3593.7 2425.2,3539.37 ; P?.1@2424.41,3716.54 2474.17,3716.54 2509.69,3752.06 2539.13,3752.06 2539.22,3751.97 2562.99,3751.97 2562.99,3555.12 2547.24,3539.37 2425.2,3539.37 ; resthatgoestotpd3.1 2415.75,3159.06 2413.39,3161.42 2413.39,3230 ; B?.24 2498.5,2950.47 2629.92,2950.47 2640,2960.55 2640,3065 ; B?.17 2549.53,3089.53 ; B?.7 2498.62,3285 2550,3285 ; B?.6 2498.31,3305 2550,3305 2550,3285 ; B?.3 2549.49,3365.12 ; B?.2 2549.49,3384.8 ; S?.1 2590.55,2130.91 2590.55,2287.4 2627.95,2324.8 2643.7,2324.8 ; B?.134@2772.36,3509.53 B?.134 2772.36,3432.36 2771.73,3431.73 2876.69,3326.77 ; P?.1@2855.12,3600 2853.54,3598.43 2903.3,3598.43 2938.83,3562.9 2996.16,3562.9 ; MKL02.2 2879.92,2297.24 MKL02.17 2767.72,2409.45 2744.09,2409.45 2724.41,2389.76 2724.41,2330.71 2718.5,2324.8 LED1.2 2643.7,2324.8 ; LED2.2 3090.55,2492.13 3090.55,2559.06 3055.12,2594.49 2976.38,2594.49 2969.21,2601.65 B?.57 2969.53,2637.56 2969.53,2690.47 3005,2725.94 3005,2810 ; ?.2 3234.84,2194.29 3240.16,2199.61 3240.16,2275.59 3281.89,2317.32 3318.9,2317.32 ; B?.107 3342.48,3384.53 3289.53,3384.53 3289.53,3299.53 3155,3165 3155,3080 3275,3080 ; otherweirdheader.1 3473.23,2079.53 3539.37,2145.67 3622.05,2145.67 ; J?.A12@3591.34,2561.02 3622.05,2561.02 ; J?.A1@3595.28,1931.1 3624.9,1931.1 ; J?.B12@3640.55,2342.52 3638.58,2344.49 3620.96,2344.49 ; J?.B1@3640.55,2562.99 3638.58,2561.02 3622.05,2561.02 ; J?.B12@3644.49,1929.13 3642.52,1931.1 3624.9,1931.1 ; J?.B1@3644.49,2149.61 3625.98,2149.61 3622.05,2145.67 ; P?.1@3685.04,3127.56 3682.68,3125.2 3527.56,3125.2 3511.57,3109.21 B?.93 3341.97,3110 3275,3110 3275,3080 ; P?.1@3685.04,3677.95 3681.89,3674.8 3527.56,3674.8 3439.37,3674.8 3411.02,3703.15 3244.09,3703.15 3244.09,3763.78 3228.35,3779.53 2870.08,3779.53 2855.12,3764.57 2855.12,3716.54 2897.64,3716.54 2937.01,3755.91 2965.99,3755.91 2996.02,3725.88 2996.02,3574.6 2996.16,3574.45 2996.16,3562.9 ; 1444.88,3149.61 1444.88,2984.25 1468.5,2960.63 J?.5 ; J?.5 1763.78,2960.63 1858.15,3055 C?.2@1890,3055 ; C?.2@1890,3055 1970,3055 2050,3055 2130,3055 2263.66,3055 2314.96,3106.3 2419.65,3106.3 2455.47,3070.47 2549.53,3070.47 2549.53,3089.53 ; 2157.48,3425.2 2196.85,3425.2 ; 2195,2599.49 2530.51,2599.49 2539,2591 2539,2525.44 2564.44,2500 2641.73,2500 ; 2196.85,3425.2 2196.85,3259.33 LP3diodecap.2 2202.52,3252.48 2235,3220 2235,3210 2295,3210 LP3.7 LP3.2 2413.39,3230 ; 2413.39,3230 2420,3230 2455,3265 2550,3265 2550,3285 ; 2425.2,3539.37 2425.2,3519.69 2497.24,3447.64 B?.1 2549.49,3404.49 ; 2549.49,3365.12 2549.49,3384.8 ; 2549.49,3365.12 2549.49,3345.51 2549.57,3345.43 ; 2549.49,3384.8 2549.49,3404.49 ; 2549.49,3404.49 2642.76,3404.49 2720.47,3326.77 2876.69,3326.77 ; 2549.53,3089.53 2574.06,3065 2640,3065 ; 2549.57,3345.43 2555.43,3345.43 2575,3365 2615,3365 2635,3345 2635,3285 ; 2550,3285 2635,3285 ; 2635,3285 2640,3280 2640,3065 ; 2641.73,2500 2641.73,2326.77 2643.7,2324.8 ; 2641.73,2500 2675,2500 2714.53,2539.53 2714.53,2690.47 2834.06,2810 3005,2810 ; 2876.69,3326.77 2898.46,3305 3155,3305 3028.27,3431.73 B?.121 3028.27,3530.79 2996.16,3562.9 ; 3005,2810 3010,2815 3275,2815 ; 3275,2815 3275,3080 ; 3275,2815 3275,2750 3244.53,2719.53 3244.53,2690.47 3244.8,2690.2 B?.71 3244.8,2580.3 3303.15,2521.95 3303.15,2467.8 3244.8,2409.45 LED3.2 3236.22,2350.39 3285.83,2350.39 3318.9,2317.32 ; 3318.9,2317.32 3318.9,2354.33 3409.45,2444.88 3519.68,2444.88 3551.18,2413.39 3551.18,2346.46 3589.37,2346.46 3591.34,2344.49 3620.96,2344.49 ; 3620.96,2344.49 3620.96,2549.73 3618.11,2552.58 3618.11,2557.09 3622.05,2561.02 ; 3622.05,2145.67 3622.05,2139.19 3624.9,2136.34 3624.9,1931.1
  Bottom Layer w10: otherweirdheader.1 3566.93,2181.89 3566.93,2268.9 J?.B12@3640.55,2342.52
JumperNet1: ?.3 dapthingy.4 F?.1 J?.1 pad.40 pad.41 USBcap.1 | length 4154.9
  Top Layer w10: J?.1 1586.61,3062.99 1602.36,3078.74 1602.36,3181.1 1671.22,3249.96 USBcap.1 1830.04,3249.96 1831.85,3248.15 1831.85,3225 F?.1 1865,3154.68 ; pad.41 2948.82,1846.46 dapthingy.4 2952.76,1874.02 2897.64,1929.13 2897.64,2141.73 2900.2,2144.29 ?.3
  Bottom Layer w10: pad.40 1850.39,3129.92 1657.48,3129.92 1582.68,3204.72 1299.21,3204.72 1299.21,2811.02 1574.8,2811.02 1574.8,2755.91 1732.28,2598.43 2023.62,2598.43 2775.59,1846.46 pad.41@2877.95,1846.46
Net?_8: "RS resistor.1" ?.8 | length 44
  Top Layer w10: ?.8 3318.9,2261.53 3318.9,2281.1
NetB?_9: B?.9 pad.11 pad.12 resthatgoestotpd3.2 TPD3.1 | length 786.6
  Top Layer w10: TPD3.1 2147.64,3387.8 pad.12 ; pad.11 2263.78,3133.86 2456.69,3133.86 2456.69,3195.28 resthatgoestotpd3.2 2437.01,3220.47 2463.54,3247.01 B?.9
  Bottom Layer w10: pad.12@2149.61,3362.2 2149.61,3149.61 2181.1,3118.11 pad.11
NetB?_19: B?.19 pad.30 pad.32 R?.2@1600.79,2992.13 | length 984.9
  Top Layer w10: R?.2@1600.79,2992.13 1633.86,2992.13 1649.61,3007.87 pad.32 ; pad.30 2234.47,3014 2264.47,3044 2268.22,3044 2319.52,3095.3 2415.09,3095.3 2450.92,3059.47 2456.28,3059.47 2465.59,3050.16 B?.19
  Bottom Layer w10: pad.32@1728.35,3011.81 1748.03,3031.5 2212.6,3031.5 pad.30
NetB?_20: B?.20 pad.31 pad.33 R?.2@1602.36,3035.43 | length 916
  Top Layer w10: R?.2@1602.36,3035.43 1637.8,3035.43 1681.1,3078.74 pad.33 ; pad.31@2408.43,3030.47 B?.20
  Bottom Layer w10: pad.33@1759.84,3074.8 1779.53,3055.12 2240.16,3055.12 2263.78,3031.5 pad.31
NetB?_31: B?.31 C?.1@2135.04,2850 CapChainInductor.2 inbetween1stinductorandcap.1 | length 876.3
  Top Layer w10: inbetween1stinductorandcap.1 2090,2915 2090,2894.49 CapChainInductor.2 ; C?.1@2135.04,2850 CapChainInductor.2 ; B?.31 2441.06,2813.94 2436,2819 2436,2929.56 2404.56,2961 2315.48,2961 2299.48,2945 2050,2945 2045.51,2940.51 CapChainInductor.2
NetB?_37: "next AREF cap.1" B?.37 | length 329.8
  Top Layer w10: 2360,2845.04 2360,2800 2525,2635 2573.27,2635 B?.37
NetB?_40: B?.40 Y?.1@2585.95,2560 | length 123.2
  Top Layer w10: Y?.1@2585.95,2560 2585.95,2590.95 2590.43,2595.43 2634.57,2595.43 B?.40
NetB?_41: B?.41 Y?.2@2645,2560 | length 81.1
  Top Layer w10: Y?.2@2645,2560 2654.25,2569.25 B?.41
NetB?_42: "VBAT diode cap.1" "VBAT diode friend.2" "VBAT diode.2" B?.42 | length 1414.9
  Top Layer w10: 1649.61,2802.17 1649.61,2755.91 1680.55,2724.96 1755,2724.96 ; 1800,2786.1 1755,2741.1 1755,2724.96 ; B?.42 2675,2636.18 2675,2535 2655,2515 2565,2515 2550,2530 2550,2620 2515,2620 2455,2680 2090,2680 2045.04,2724.96 1755,2724.96
NetB?_47: B?.47 LED1resistor.1 | length 184.9
  Top Layer w10: LED1resistor.1 2772.36,2547.95 B?.47
NetB?_51: B?.51 MKL02.6 | length 305.5
  Top Layer w10: B?.51 2851.1,2574.09 2909.45,2515.75 2897.64,2503.94 2897.64,2464.57 2879.92,2446.85 MKL02.6
NetB?_52: B?.52 MKL02.9 pad.21 pad.22 | length 459
  Top Layer w10: pad.21@2773.62,2336.61 MKL02.9 ; B?.52 2870.79,2578.03 2925.2,2523.62 pad.22
  Bottom Layer w10: pad.21 2763.78,2409.45 pad.22@2901.57,2409.45
NetB?_55: B?.55 LED2resistor.1 | length 108
  Top Layer w10: B?.55 2929.84,2597.72 2954.33,2573.23 LED2resistor.1
NetB?_66: B?.66 LED3resistor.1 | length 90.2
  Top Layer w10: B?.66 3146.38,2590.63 LED3resistor.1
NetB?_72: B?.72 Y?.1@3420,2625.47 | length 160.4
  Top Layer w10: B?.72 3367.76,2637.24 3379.53,2625.47 Y?.1@3420,2625.47
NetB?_73: B?.73 Y?.2@3420,2684.53 | length 90.1
  Top Layer w10: B?.73 3373.74,2684.53 Y?.2@3420,2684.53
NetB?_110: B?.110 ondiode.1 | length 70.7
  Top Layer w10: ondiode.1 3244.09,3483.46 B?.110
NetF?_2: F?.2 LP3inductor.1 | length 61.3
  Top Layer w10: F?.2 1868.15,3248.15 LP3inductor.1
NetJ?_2: J?.2 R?.1@1566.14,3035.43 | length 55.1
  Top Layer w10: J?.2@1511.81,3033.46 1513.78,3035.43 R?.1@1566.14,3035.43
NetJ?_3: J?.3 R?.1@1564.57,2992.13 | length 63.2
  Top Layer w10: J?.3@1511.81,3007.87 1543.31,3007.87 1559.06,2992.13 1564.57,2992.13 R?.1@1568.5,2992.13
NetLED1_1: LED1.1 LED1resistor.2 | length 52
  Top Layer w10: LED1.1@2700.79,2393.7 2704.72,2397.64 LED1resistor.2
NetLED2_1: LED2.1 LED2resistor.2 | length 79.9
  Top Layer w10: LED2resistor.2 3024.41,2524.41 3054.33,2524.41 LED2.1
NetLED3_1: LED3.1 LED3resistor.2 | length 47.2
  Top Layer w10: LED3.1 LED3resistor.2
NetLP3_1: LP3.1 LP3.6 LP3diode1.2 LP3diode2.2 LP3diodecap.1 TPD3.3 TPD3capfromLP3.1 | length 825
  Top Layer w10: TPD3.3 2084.65,3488.19 ; LP3diode2.2 2110.24,3295.28 2039.37,3366.14 2039.37,3488.19 2084.65,3488.19 ; LP3diode2.2@2118.11,3307.09 2123.9,3301.3 2123.9,3180 2182.48,3180 LP3diodecap.1 2195.08,3192.6 LP3.6 2257.91,3177.09 2260,3175 2370,3175 2370,3190.51 LP3.1 ; TPD3capfromLP3.1 2106.3,3539.37 2084.65,3517.72 2084.65,3488.19
NetLP3diode1_1: LP3diode1.1 LP3diode2.1 LP3inductor.2 | length 152.3
  Top Layer w10: LP3inductor.2 1971.1,3195 1986.1,3180 LP3diode2.1@1986.1,3265
Netondiode_2: ondiode.2 R?.1@3244.09,3666.93 | length 46.9
  Top Layer w10: ondiode.2 R?.1@3244.09,3666.93
NetonlyTPD3cap_1: onlyTPD3cap.1 TPD3.4 | length 69.9
  Top Layer w10: onlyTPD3cap.1 1974.41,3474.41 TPD3.4
"Prog Header": MKL02.10 S?.3 | length 252.9
  Top Layer w10: S?.3 2785.43,2121.06 2785.43,2316.93 MKL02.10
"Reset Header": B?.74 MKL02.4 MKL02.13 | length 3748
  Top Layer w10: MKL02.13 2842.52,2244.09 2842.52,2208.66 ; MKL02.4 3035.43,2336.61 3035.43,2208.66 3015.75,2208.66 2842.52,2208.66 ; B?.74 3941.97,2735.2 3980.32,2696.85 3980.32,1696.85 2874.02,1696.85 2842.52,1728.35 2842.52,2208.66
Rx: B?.96
Tx: B?.95
"VBAT Header": "VBAT diode.1"
VCC: dapthingy.1 J?.B2 J?.B3 otherweirdheader.2 P?.2 pad.42 | length 3976.8
  Top Layer w10: P?.2@2524.41,3594.49 P?.2@2524.41,3716.54 ; P?.2@2953.54,3598.43 2955.12,3600 P?.2@2955.12,3716.54 ; dapthingy.1 pad.42 ; P?.2@3527.56,3025.2 3682.68,3025.2 P?.2@3685.04,3027.56 ; P?.2@3527.56,3574.8 3681.89,3574.8 P?.2@3685.04,3577.95 ; J?.B2@3668.11,2547.24 3668.11,2515.75 3826.77,2515.75 3826.77,2248.03 3533.07,2248.03 otherweirdheader.2 3666.93,2179.53 3672.05,2174.41 3672.05,2133.86 J?.B3@3672.05,2102.36
  Bottom Layer w10: P?.2@2524.41,3716.54 2604.72,3796.85 2955.12,3796.85 ; P?.2@2955.12,3716.54 2955.12,3796.85 ; pad.42 3468.5,1874.02 3468.5,1901.57 3393.7,1976.38 3393.7,2108.66 otherweirdheader.2 ; P?.2@3527.56,3574.8 3480.32,3574.8 3258.27,3796.85 2955.12,3796.85 ; P?.2@3685.04,3027.56 3751.97,3094.49 3751.97,3511.02 P?.2@3685.04,3577.95
pads on no net: ?.5 B?.10 B?.11 B?.12 B?.13 B?.14 B?.15 B?.23 B?.28 B?.35 B?.36 B?.38 B?.39 B?.45 B?.46 B?.48 B?.49 B?.54 B?.58 B?.59 B?.60 B?.61 B?.62 B?.63 B?.67 B?.68 B?.69 B?.75 B?.76 B?.77 B?.78 B?.79 B?.80 B?.85 B?.86 B?.87 B?.88 B?.89 B?.90 B?.91 B?.92 B?.97 B?.98 B?.99 B?.100 B?.101 B?.102 B?.103 B?.115 B?.116 B?.117 B?.118 B?.119 B?.120 B?.123 B?.124 B?.125 B?.126 B?.127 B?.128 B?.131 B?.136 B?.137 B?.138 B?.139 B?.140 B?.141 B?.142 B?.143 B?.144 dapthingy.2 dapthingy.3 J?. J?.4 J?.A2 J?.A3 J?.A4 J?.A5 J?.A6 J?.A7 J?.A8 J?.A9 J?.A10 J?.A11 J?.B4 J?.B6 J?.B7 J?.B9 J?.Shell@3640.55,2374.02 J?.Shell@3640.55,2531.5 J?.Shell@3644.49,1960.63 J?.Shell@3644.49,2118.11 J?.Shell@3685.83,2284.65 J?.Shell@3685.83,2620.87 J?.Shell@3689.76,1871.26 J?.Shell@3689.76,2207.48 J?.Shell@3872.05,2284.65 J?.Shell@3872.05,2620.87 J?.Shell@3875.98,1871.26 J?.Shell@3875.98,2207.48 LP3.3 MKL02.5 MKL02.11 MKL02.12 MKL02.14 MKL02.15 MKL02.16 S?.2 S?.4
copper on no net: | length 2351.7
  Top Layer w10: 1359.98,3988.25 1360.09,4008.25 ; 1419.92,3977.92 1360.03,3998.25 ; 1420.14,4017.92 1360.03,3998.25 ; 2389.36,3992.56 1360.03,3998.25 ; 3181.1,3988.19 4210.43,3982.5 ; 4150.32,3962.83 4210.43,3982.5 ; 4150.54,4002.83 4210.43,3982.5 ; 4210.37,3972.5 4210.48,3992.5

## Other copper
Top Layer:
  text "2850.437 (mil)" at 2399.16,3956.52 h60 r359.68

## Text inside footprints (layer, text, board x,y; h text height)
J?: Mechanical 15 "PCB Edge" at 1309.06,3086.61 h39.37 r270